# Altium PCB PCB2.PcbDoc
Units mm, origin at the board's own origin, x right, y up, seen from the top; angles counter-clockwise.
Board outline 100 x 100 mm, 2 copper layers (Top Layer, Bottom Layer); 17 components, 59 nets, 177 pads, 15 vias.
Unrouted connection lines stored in the file: 5.
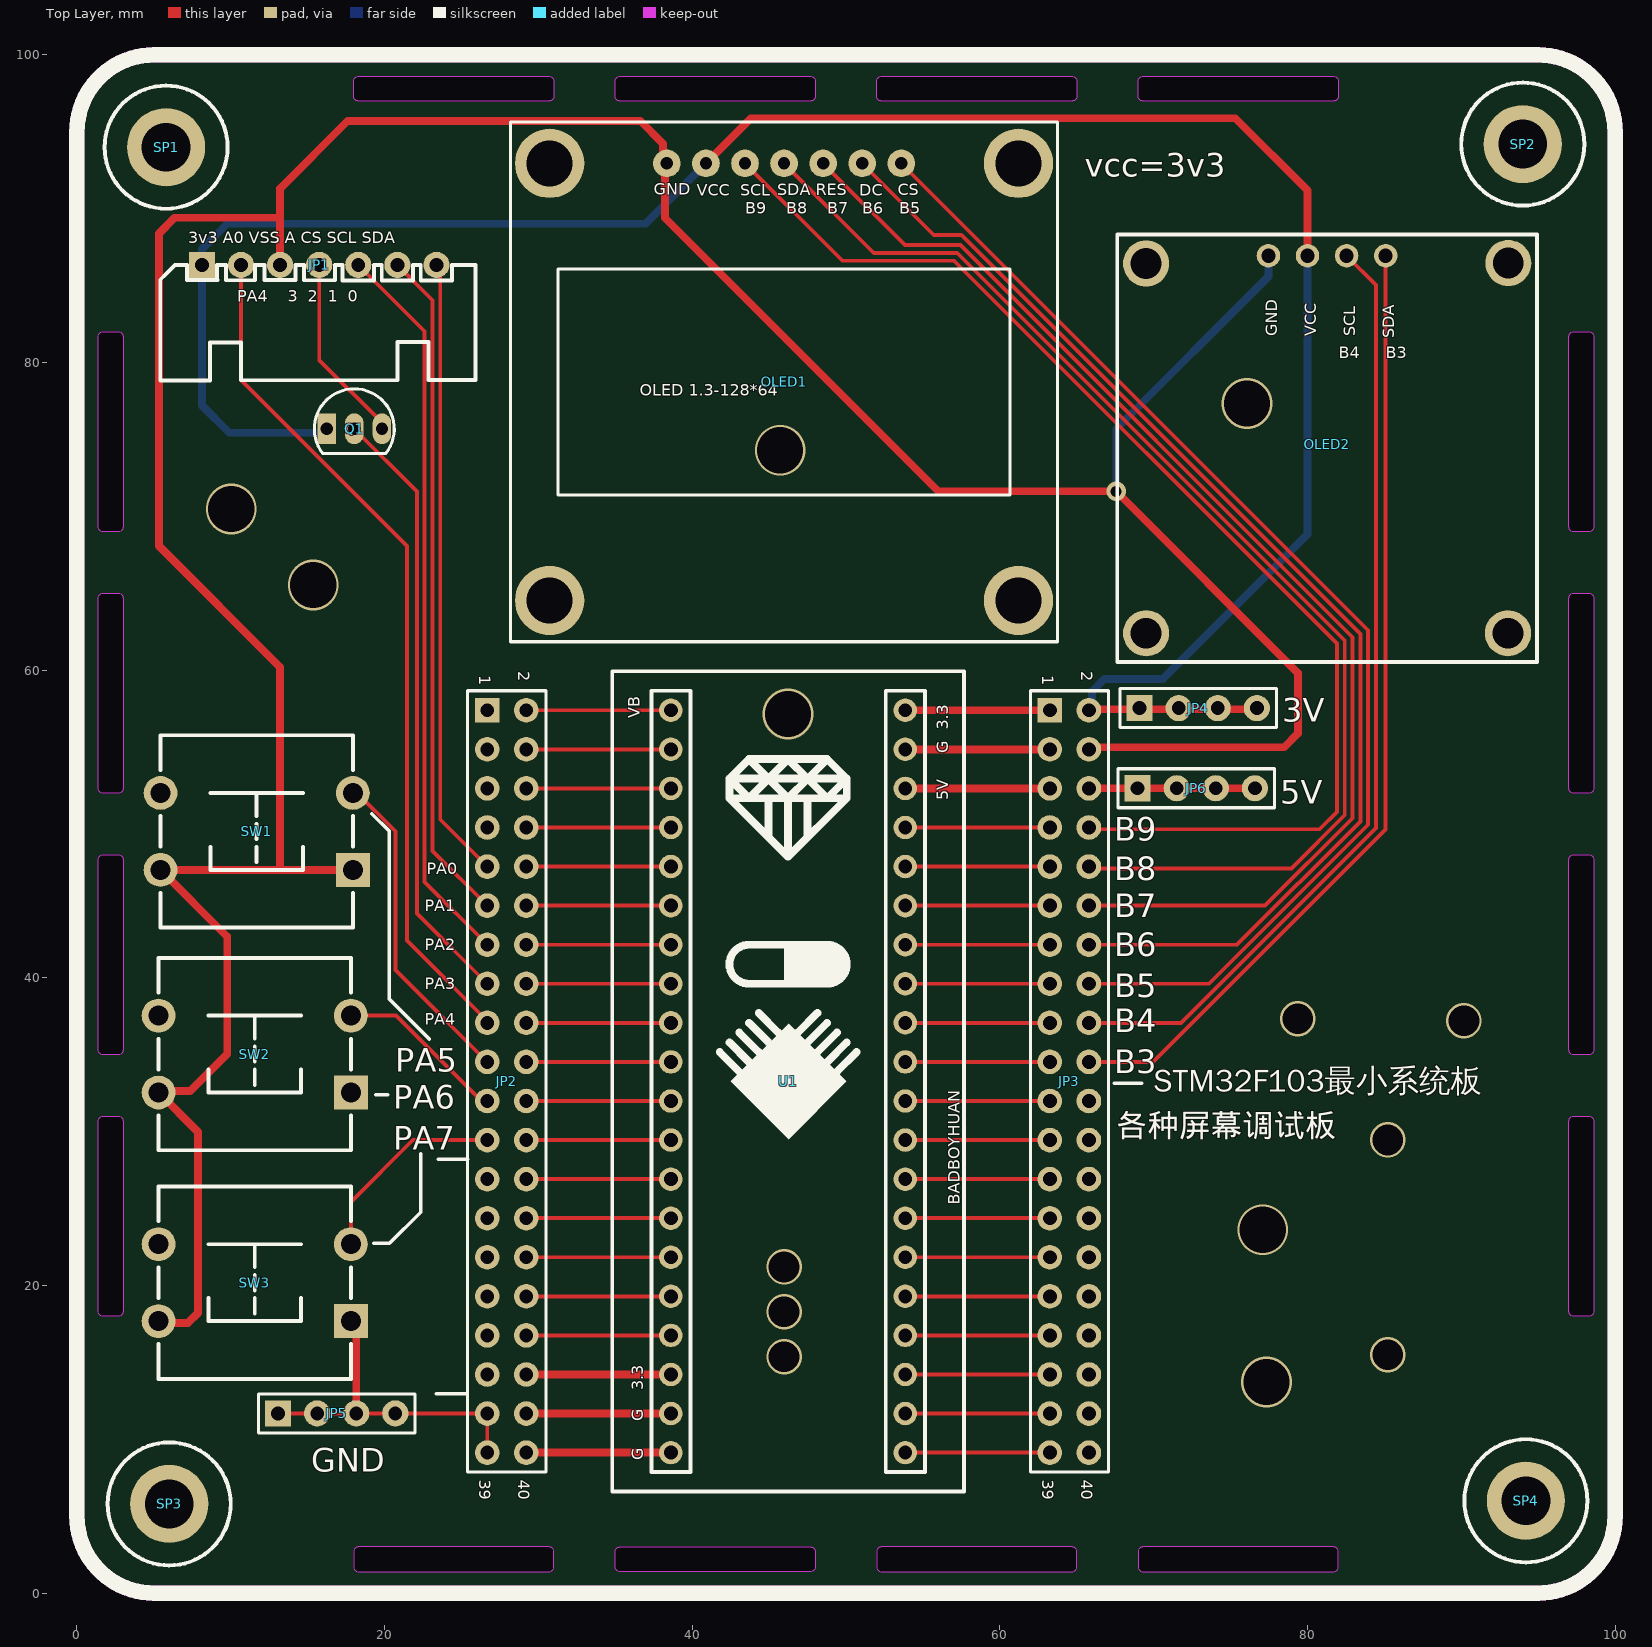
[diagram p0: Top Layer view]
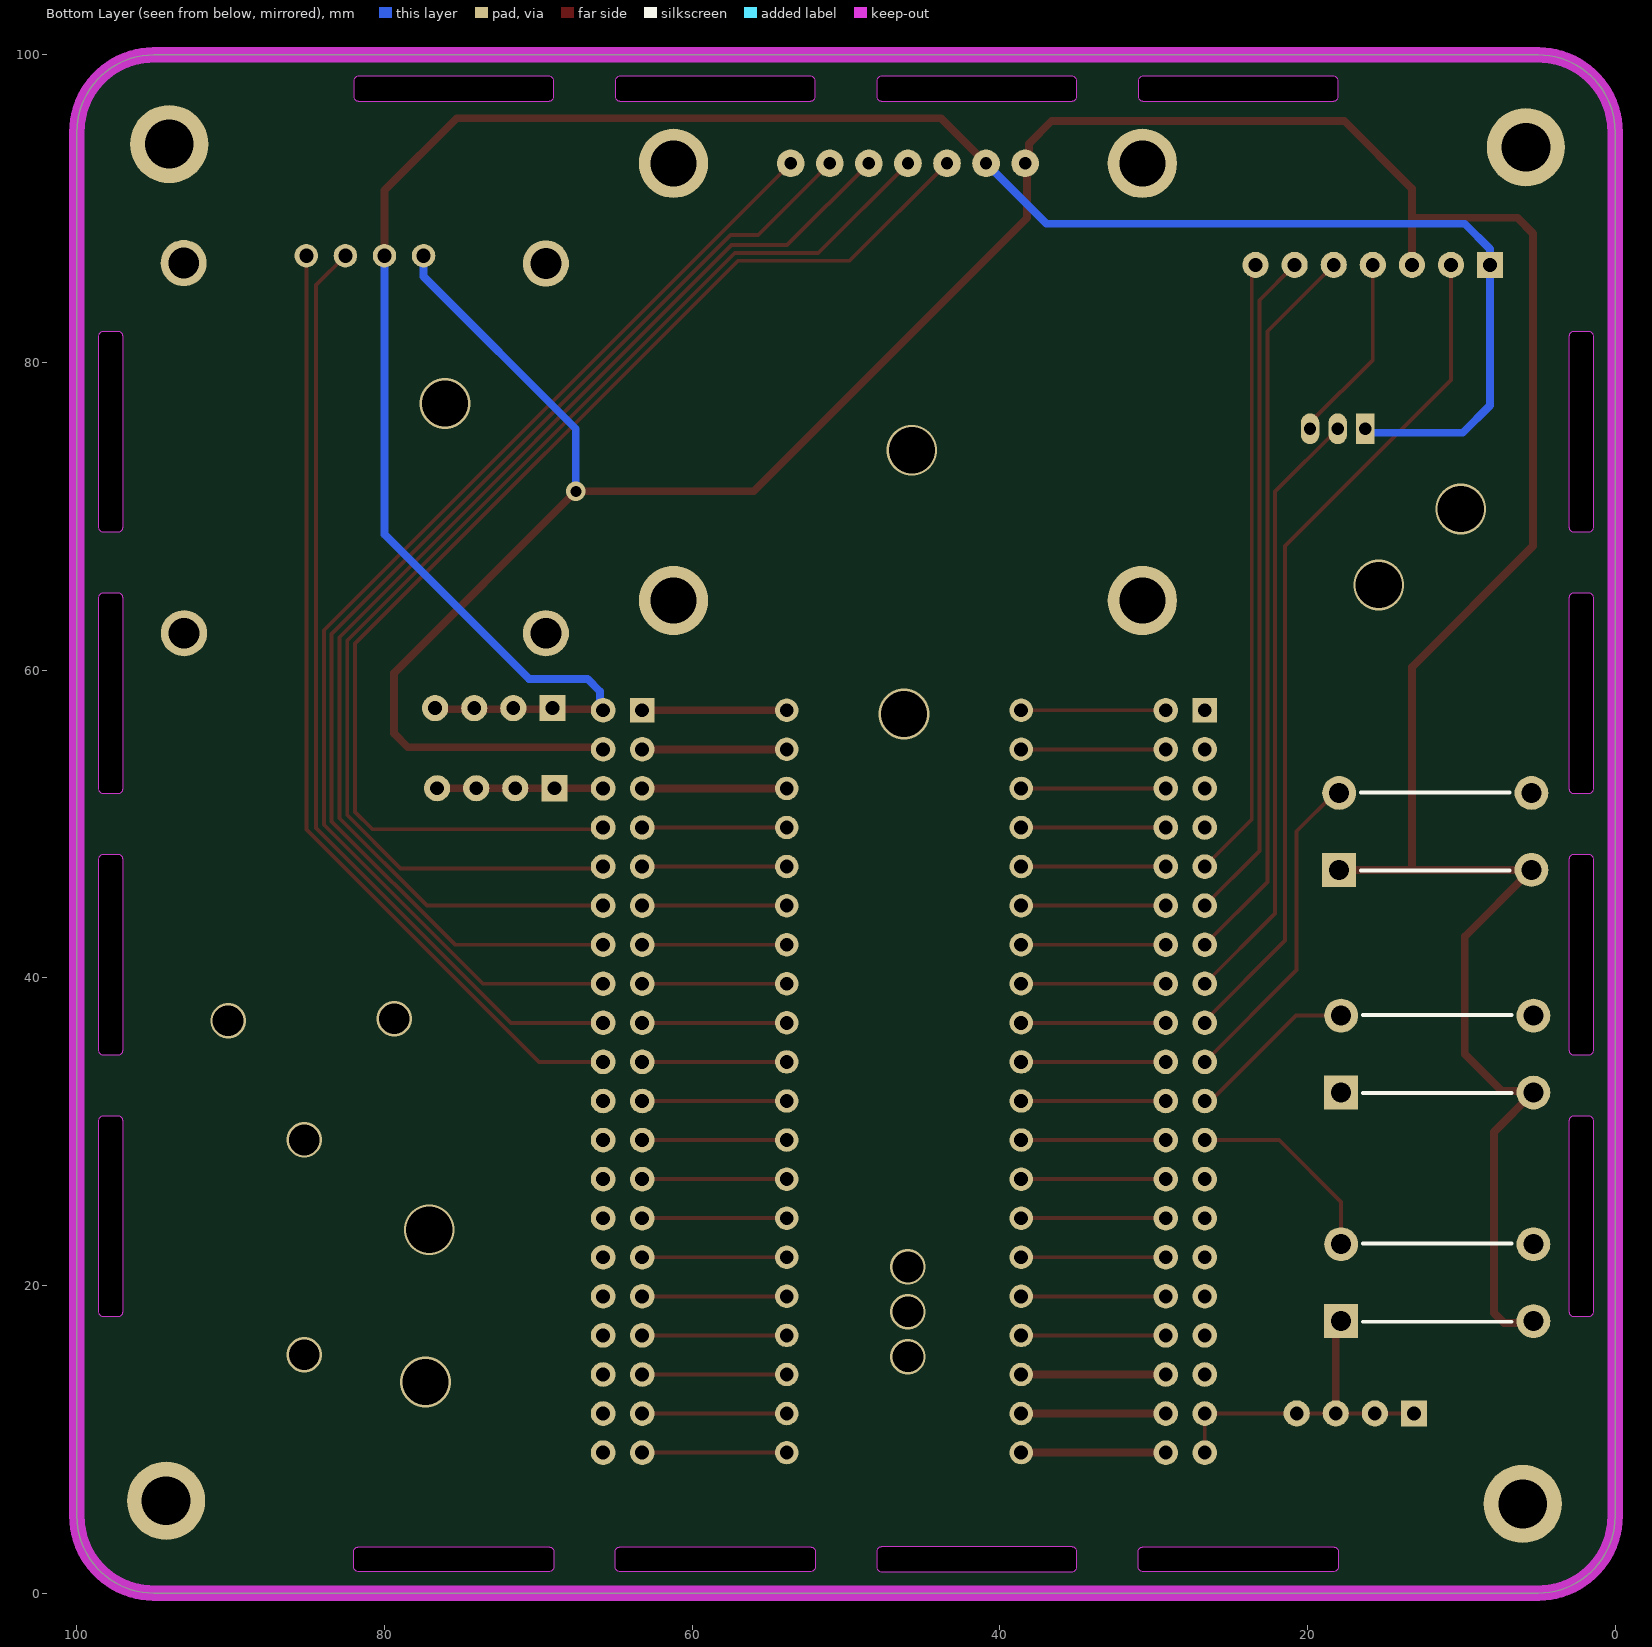
[diagram p1: Bottom Layer view, seen from below]

## Layer stack, top to bottom
Top Solder: solder mask 0.0102, Solder Resist, Dk 3.5
Top Layer: signal copper 0.0356
Dielectric 1: dielectric 0.32, FR-4, Dk 4.8
Bottom Layer: signal copper 0.0356
Bottom Solder: solder mask 0.0102, Solder Resist, Dk 3.5

## Board outline
0,5 0,95 cw(c5,95) 5,100 95,100 cw(c95,95) 100,95 100,5 cw(c95,5) 95,0 5,0 cw(c5,5)
cut-out: 2.7,69 1.7,69 cw(c1.7,69.3) 1.4,69.3 1.4,81.7 cw(c1.7,81.7) 1.7,82 2.7,82 cw(c2.7,81.7) 3,81.7 3,69.3 cw(c2.7,69.3)
cut-out: 2.7,52 1.7,52 cw(c1.7,52.3) 1.4,52.3 1.4,64.7 cw(c1.7,64.7) 1.7,65 2.7,65 cw(c2.7,64.7) 3,64.7 3,52.3 cw(c2.7,52.3)
cut-out: 2.7,35 1.7,35 cw(c1.7,35.3) 1.4,35.3 1.4,47.7 cw(c1.7,47.7) 1.7,48 2.7,48 cw(c2.7,47.7) 3,47.7 3,35.3 cw(c2.7,35.3)
cut-out: 2.7,18 1.7,18 cw(c1.7,18.3) 1.4,18.3 1.4,30.7 cw(c1.7,30.7) 1.7,31 2.7,31 cw(c2.7,30.7) 3,30.7 3,18.3 cw(c2.7,18.3)
cut-out: 69,97.3 69,98.3 cw(c69.3,98.3) 69.3,98.6 81.7,98.6 cw(c81.7,98.3) 82,98.3 82,97.3 cw(c81.7,97.3) 81.7,97 69.3,97 cw(c69.3,97.3)
cut-out: 52,97.3 52,98.3 cw(c52.3,98.3) 52.3,98.6 64.7,98.6 cw(c64.7,98.3) 65,98.3 65,97.3 cw(c64.7,97.3) 64.7,97 52.3,97 cw(c52.3,97.3)
cut-out: 35,97.3 35,98.3 cw(c35.3,98.3) 35.3,98.6 47.7,98.6 cw(c47.7,98.3) 48,98.3 48,97.3 cw(c47.7,97.3) 47.7,97 35.3,97 cw(c35.3,97.3)
cut-out: 18,97.3 18,98.3 cw(c18.3,98.3) 18.3,98.6 30.7,98.6 cw(c30.7,98.3) 31,98.3 31,97.3 cw(c30.7,97.3) 30.7,97 18.3,97 cw(c18.3,97.3)
cut-out: 97.3,31 98.3,31 cw(c98.3,30.7) 98.6,30.7 98.6,18.3 cw(c98.3,18.3) 98.3,18 97.3,18 cw(c97.3,18.3) 97,18.3 97,30.7 cw(c97.3,30.7)
cut-out: 97.3,48 98.3,48 cw(c98.3,47.7) 98.6,47.7 98.6,35.3 cw(c98.3,35.3) 98.3,35 97.3,35 cw(c97.3,35.3) 97,35.3 97,47.7 cw(c97.3,47.7)
cut-out: 97.3,65 98.3,65 cw(c98.3,64.7) 98.6,64.7 98.6,52.3 cw(c98.3,52.3) 98.3,52 97.3,52 cw(c97.3,52.3) 97,52.3 97,64.7 cw(c97.3,64.7)
cut-out: 97.3,82 98.3,82 cw(c98.3,81.7) 98.6,81.7 98.6,69.3 cw(c98.3,69.3) 98.3,69 97.3,69 cw(c97.3,69.3) 97,69.3 97,81.7 cw(c97.3,81.7)
cut-out: 18,1.7 ccw(c18.3,1.7) 18.3,1.4 30.7,1.4 ccw(c30.7,1.7) 31,1.7 31,2.7 ccw(c30.7,2.7) 30.7,3 18.3,3 ccw(c18.3,2.7) 18,2.7
cut-out: 35,1.7 35,2.7 cw(c35.3,2.7) 35.3,3 47.7,3 cw(c47.7,2.7) 48,2.7 48,1.7 cw(c47.7,1.7) 47.7,1.4 35.3,1.4 cw(c35.3,1.7)
cut-out: 52,1.7 ccw(c52.3,1.7) 52.3,1.4 64.7,1.4 ccw(c64.7,1.7) 65,1.7 65,2.7 ccw(c64.7,2.7) 64.7,3 52.3,3 ccw(c52.3,2.7) 52,2.7
cut-out: 69,1.7 ccw(c69.3,1.7) 69.3,1.4 81.7,1.4 ccw(c81.7,1.7) 82,1.7 82,2.7 ccw(c81.7,2.7) 81.7,3 69.3,3 ccw(c69.3,2.7) 69,2.7

## Design rules (kind name [scope] priority, off if disabled: settings)
Clearance [All] p1: gap=0.254 ignorepadtopadclearanceinfootprint=FALSE except(0: Arc-Hole Track-Hole SMDPad-Hole THPad-Hole Via-Hole Fill-Hole Poly-Hole Region-Hole Text-Hole)
PolygonConnect [All] p1: connectstyle=Relief reliefconductorwidth=0.254 reliefentries=4 polygonreliefangle="90 Angle" airgapwidth=0.254
RoutingVias [All] p1: holewidth=0.711 width=1.27 viastyle="Through Hole" minholewidth=0.711 minwidth=1.27 maxholewidth=0.711 maxwidth=1.27
SolderMaskExpansion [All] p1: expansion=0.102 istentingtop=FALSE
Width [All] p1: maxlimit=1.016 minlimit=0.254 preferedwidth=0.254 minimp=50.000000 maximp=50.000000 favimp=50.000000
30 further rules are at their usual default settings.

## Components (designator, comment, footprint, x,y, rotation, side; value= is the part's Value field where it differs from the comment)
JP1 "HDR-1X7" XH2.54-WI-7P 15.753,86.349 r0 top
JP2 "Header 2X11" HDR2.54-LI-2x20P 27.945,33.263 r270 top
JP3 "Header 2X11" HDR2.54-LI-2x20P 64.521,33.263 r270 top
JP4 "HDR-1X4" HDR2.54-M-LI-4P 72.898,57.531 r0 top
JP5 "HDR-1X4" HDR2.54-LI-4P 16.891,11.684 r0 top
JP6 "HDR-1X4" HDR2.54-LI-4P 72.771,52.324 r0 top
OLED1 "OLED 1.3-12864_7pin" 1.3-SPI-OLED 45.974,78.74 r0 top
OLED2 "OLED-IIC" 0.96-IIC-OLED 81.28,74.422 r0 top
Q1 "S9012" TO92A 18.034,75.692 r270 top
SP1 "M3铜柱" M3x4_L 5.8,94 r90 top
SP2 "M3铜柱" M3x4_L 94,94.2 r0 top
SP3 "M3铜柱" M3x4_L 6,5.8 r180 top
SP4 "M3铜柱" M3x4_L 94.2,6 r270 top
SW1 "12x12x5" "TSW DIP-12*12*4.3" 11.689,49.519 r180 top
SW2 "12x12x5" "TSW DIP-12*12*4.3" 11.562,35.041 r180 top
SW3 "12x12x5" "TSW DIP-12*12*4.3" 11.562,20.182 r180 top
U1 "STM32C8T6最小系统板" STM32C8T6 53.853,57.393 r0 top

## Footprints (in the part's own frame and the unit in brackets; to place one, negate y for a bottom-side part, rotate by r counter-clockwise, add the part's x,y. Pads: shape width x height; smd on the part's side, far side on the other; paste and mask are expansions set on the pad)
0.96-IIC-OLED [mm]
  round 1.524 hole 0.914: 1(-3.816,12.521) 2(-1.276,12.521) 3(1.264,12.521) 4(3.804,12.521)
  round 3 hole 2: 5(-11.769,12.015) 6(11.779,12.043) 7(-11.769,-12.021) 8(11.754,-12.018)
  silkscreen extent -13.65,-13.89 13.65,13.89, body extent -13.35,-12.87 13.35,14.99, height 4.01
1.3-SPI-OLED [mm] "长：35.4mm，宽：33.5mm，"
  round 4.5 hole 3: 0(-15.24,-14.21) 0(-15.24,14.21) 0(15.24,-14.21) 0(15.24,14.21)
  round 1.8 hole 0.8: 1(-7.62,14.21) 2(-5.08,14.21) 3(-2.54,14.21) 4(0,14.21) 5(2.54,14.21) 6(5.08,14.21) 7(7.62,14.21)
  silkscreen extent -17.78,-16.89 17.78,16.89, body extent -17.7,-16.75 17.7,16.75, height 5.5
HDR2.54-LI-2x20P [mm] "双排排针，20x2脚"
  rect 1.6x1.6 hole 0.9: 1(-24.13,-1.27)
  round 1.6 hole 0.9: 2(-24.13,1.27) 3(-21.59,-1.27) 4(-21.59,1.27) 5(-19.05,-1.27) 6(-19.05,1.27) 7(-16.51,-1.27) 8(-16.51,1.27) 9(-13.97,-1.27) 10(-13.97,1.27) 11(-11.43,-1.27) 12(-11.43,1.27) 13(-8.89,-1.27) 14(-8.89,1.27) 15(-6.35,-1.27) 16(-6.35,1.27) 17(-3.81,-1.27) 18(-3.81,1.27) 19(-1.27,-1.27) 20(-1.27,1.27) 21(1.27,-1.27) 22(1.27,1.27) 23(3.81,-1.27) 24(3.81,1.27) 25(6.35,-1.27) 26(6.35,1.27) 27(8.89,-1.27) 28(8.89,1.27) 29(11.43,-1.27) 30(11.43,1.27) 31(13.97,-1.27) 32(13.97,1.27) 33(16.51,-1.27) 34(16.51,1.27) 35(19.05,-1.27) 36(19.05,1.27) 37(21.59,-1.27) 38(21.59,1.27) 39(24.13,-1.27) 40(24.13,1.27)
  silkscreen extent -25.4,-2.54 25.4,2.54, body extent -25.4,-2.54 25.4,2.54, height 8.5
HDR2.54-LI-4P [mm] "排针，4脚"
  rect 1.7x1.7 hole 0.9: 1(-3.81,0)
  round 1.7 hole 0.9: 2(-1.27,0) 3(1.27,0) 4(3.81,0)
  silkscreen extent -5.08,-1.27 5.08,1.27, body extent -5.08,-1.27 5.08,1.27, height 8.5
HDR2.54-M-LI-4P [mm] "排母，4脚"
  rect 1.7x1.7 hole 0.9: 1(-3.81,0)
  round 1.7 hole 0.9: 2(-1.27,0) 3(1.27,0) 4(3.81,0)
  silkscreen extent -5.08,-1.27 5.08,1.27, body extent -5.08,-1.27 5.08,1.27, height 8.5
M3x4_L [mm] "M3铜柱，长：4mm"
  round 5.08 hole 3.175: 1(0,0)
  silkscreen extent -4,-4 4,4, body extent -2.7,-2.35 2.7,2.35, height 4.05
STM32C8T6 [mil]
  round 60 hole 35.43: 0(0,0) 1(0,-100) 2(0,-200) 3(0,-300) 4(0,-400) 5(0,-500) 6(0,-600) 7(0,-700) 8(0,-800) 9(0,-900) 10(0,-1000) 11(0,-1100) 12(0,-1200) 13(0,-1300) 14(0,-1400) 15(0,-1500) 16(0,-1600) 17(0,-1700) 18(0,-1800) 19(0,-1900) 20(-600,0) 21(-600,-100) 22(-600,-200) 23(-600,-300) 24(-600,-400) 25(-600,-500) 26(-600,-600) 27(-600,-700) 28(-600,-800) 29(-600,-900) 30(-600,-1000) 31(-600,-1100) 32(-600,-1200) 33(-600,-1300) 34(-600,-1400) 35(-600,-1500) 36(-600,-1600) 37(-600,-1700) 38(-600,-1800) 39(-600,-1900)
  silkscreen extent -750,-2000 150,100
TO92A [mm] "92晶体管"
  rect 2x1.2 hole 0.8: 1(0,-1.8)
  oval 2x1.2 hole 0.8: 2(0,0) 3(0,1.8)
  silkscreen extent -2.6,-2.6 1.6,2.6, body extent -2.3,-2.3 1.3,2.3, height 7.6
"TSW DIP-12*12*4.3" [mm] "12*12*4.3mm"
  rect 2.2x2.2 hole 1.3: 1(-6.25,2.5)
  round 2.2 hole 1.3: 2(-6.25,-2.5) 3(6.25,-2.5) 4(6.25,2.5)
  silkscreen extent -6.25,-6.25 6.25,6.25, body extent -6.9,-6 6.9,6, height 4.45
XH2.54-WI-7P [mm] "接插件，7P"
  rect 1.7x1.7 hole 0.9: 1(-7.62,0)
  round 1.7 hole 0.9: 2(-5.08,0) 3(-2.54,0) 4(0,0) 5(2.54,0) 6(5.08,0) 7(7.62,0)
  silkscreen extent -10.34,-7.53 10.16,0, body extent -10.12,-7.35 10.12,0.35, height 5.75

## Part data
JP1: library part "Header 7  2.54", "7P接插件  2.54", BOM名称=7P接插件, 学习资源=www.ooocke.com, 版权归属=源创客
JP2 JP3: library part "Header 20X2  2.54", "20*2P接插件  2.54", BOM名称=20*2P接插件, 学习资源=www.ooocke.com, 版权归属=源创客
JP4 JP5 JP6: library part "Header 4  2.54", "4P接插件  2.54", BOM名称=4P接插件, 学习资源=www.ooocke.com, 版权归属=源创客
OLED1: library part OLED-SPI, "12864 点阵屏", BOM名称="12864 点阵屏", 学习资源=www.ooocke.com, 版权归属=源创客
OLED2: "OLED 0.96寸 1.3寸 IIC显示屏"
Q1: library part 9012-DIP, "低频放大-PNP型", BOM名称=低频放大-PNP型, 学习资源=www.ooocke.com, 属性="50V 0.5A 0.625W", 版权归属=源创客
SP1 SP2 SP3 SP4: library part 铜柱小焊盘, "铜柱", BOM名称=铜柱, 学习资源=www.ooocke.com, 版权归属=源创客
SW1 SW2 SW3: library part "TSW DIP-12x12", "直插12x12轻触开关", BOM名称=直插12x12轻触开关, 学习资源=www.ooocke.com, 版权归属=源创客

## Via types
v1: diameter 3.3, hole 3, Top Layer to Bottom Layer, tented both sides, 7 vias
v2: diameter 2.3, hole 2, Top Layer to Bottom Layer, tented both sides, 7 vias
v3: diameter 1.27, hole 0.711, Top Layer to Bottom Layer, 1 vias

## Nets (pads, with @x,y where several pads share a name; then routed paths per layer and width w, separated by ;. In a path a pad name is that pad's centre, name@x,y a point inside that pad or via, vN(x,y) a via of type N, cw(c..) or ccw(c..) an arc to the next point about the centre after c; other vN are vias at no path point)
3V3: JP1.1 JP3.2 JP4.1 JP4.2 JP4.3 JP4.4 OLED1.2 OLED2.2 Q1.1 | length 149.3
  Top Layer w0.508: OLED1.2 43.829,95.885 75.311,95.885 80.01,91.186 80.01,86.949 OLED2.2 ; JP3.2 65.86,57.462 76.639,57.462 JP4.4
  Bottom Layer w0.508: Q1.1 15.98,75.438 9.906,75.438 8.133,77.211 8.133,87.381 9.779,89.027 36.971,89.027 OLED1.2 ; JP3.2 66,57.602 66,58.634 66.802,59.436 70.612,59.436 80.004,68.828 OLED2.2
5V: JP3.6 JP6.1 JP6.2 JP6.3 JP6.4 | length 10.8
  Top Layer w0.508: JP3.6 65.797,52.318 76.575,52.318 JP6.4
A: JP1.4 Q1.3 | length 12.3
  Top Layer w0.254: JP1.4 15.753,80.173 19.834,76.092 Q1.3
A0: JP1.2 JP2.17 | length 55.9
  Top Layer w0.254: JP1.2 10.673,78.862 21.463,68.072 21.463,42.418 26.675,37.206 JP2.17
CS: JP1.5 JP2.13 | length 47.7
  Top Layer w0.254: JP1.5 22.606,82.036 22.606,46.222 JP2.13
NetJP2_2: JP2.2 U1.20 | length 9.4
  Top Layer w0.254: JP2.2 U1.20
NetJP2_4: JP2.4 U1.21 | length 9.4
  Top Layer w0.254: JP2.4 U1.21
NetJP2_6: JP2.6 U1.22 | length 9.4
  Top Layer w0.254: JP2.6 U1.22
NetJP2_8: JP2.8 U1.23 | length 9.4
  Top Layer w0.254: JP2.8 U1.23
NetJP2_10: JP2.10 U1.24 | length 9.4
  Top Layer w0.254: JP2.10 U1.24
NetJP2_12: JP2.12 U1.25 | length 9.4
  Top Layer w0.254: JP2.12 U1.25
NetJP2_14: JP2.14 U1.26 | length 9.4
  Top Layer w0.254: JP2.14 U1.26
NetJP2_15: JP2.15 Q1.2 | length 39.7
  Top Layer w0.254: Q1.2 22.098,71.628 22.098,44.19 JP2.15
NetJP2_16: JP2.16 U1.27 | length 9.4
  Top Layer w0.254: JP2.16 U1.27
NetJP2_18: JP2.18 U1.28 | length 9.4
  Top Layer w0.254: JP2.18 U1.28
NetJP2_20: JP2.20 U1.29 | length 9.4
  Top Layer w0.254: JP2.20 U1.29
NetJP2_22: JP2.22 U1.30 | length 9.4
  Top Layer w0.254: JP2.22 U1.30
NetJP2_24: JP2.24 U1.31 | length 9.4
  Top Layer w0.254: JP2.24 U1.31
NetJP2_26: JP2.26 U1.32 | length 9.4
  Top Layer w0.254: JP2.26 U1.32
NetJP2_28: JP2.28 U1.33 | length 9.4
  Top Layer w0.254: JP2.28 U1.33
NetJP2_30: JP2.30 U1.34 | length 9.4
  Top Layer w0.254: JP2.30 U1.34
NetJP2_32: JP2.32 U1.35 | length 9.4
  Top Layer w0.254: JP2.32 U1.35
NetJP2_34: JP2.34 U1.36 | length 9.4
  Top Layer w0.254: JP2.34 U1.36
NetJP2_36: JP2.36 U1.37 | length 18.8
  Top Layer w0.254: JP2.36 U1.37
  Top Layer w0.508: JP2.36 U1.37
NetJP2_38: JP2.38 U1.38 | length 18.8
  Top Layer w0.254: JP2.38 U1.38
  Top Layer w0.508: JP2.38 U1.38
NetJP2_40: JP2.40 U1.39 | length 18.8
  Top Layer w0.254: JP2.40 U1.39
  Top Layer w0.508: JP2.40 U1.39
NetJP3_1: JP3.1 U1.0 | length 9.4
  Top Layer w0.508: U1.0 JP3.1
NetJP3_3: JP3.3 U1.1 | length 18.8
  Top Layer w0.254: U1.1 JP3.3
  Top Layer w0.508: U1.1 JP3.3
NetJP3_5: JP3.5 U1.2 | length 9.4
  Top Layer w0.508: U1.2 JP3.5
NetJP3_7: JP3.7 U1.3 | length 9.4
  Top Layer w0.254: U1.3 JP3.7
NetJP3_8: JP3.8 OLED1.3 | length 79
  Top Layer w0.254: OLED1.3 49.77,86.614 57.023,86.614 81.915,61.722 81.915,50.793 80.779,49.657 65.907,49.657 JP3.8
NetJP3_9: JP3.9 U1.4 | length 9.4
  Top Layer w0.254: U1.4 JP3.9
NetJP3_10: JP3.10 OLED1.4 | length 78.8
  Top Layer w0.254: OLED1.4 51.802,87.122 57.233,87.122 82.423,61.932 82.423,50.582 78.958,47.117 65.907,47.117 JP3.10
NetJP3_11: JP3.11 U1.5 | length 9.4
  Top Layer w0.254: U1.5 JP3.11
NetJP3_12: JP3.12 OLED1.5 | length 78.4
  Top Layer w0.254: OLED1.5 53.834,87.63 57.444,87.63 82.931,62.143 82.931,50.372 77.252,44.693 JP3.12
NetJP3_13: JP3.13 U1.6 | length 9.4
  Top Layer w0.254: U1.6 JP3.13
NetJP3_14: JP3.14 OLED1.6 | length 78.2
  Top Layer w0.254: OLED1.6 55.703,88.301 57.495,88.301 83.439,62.357 83.439,50.161 75.431,42.153 JP3.14
NetJP3_15: JP3.15 U1.7 | length 9.4
  Top Layer w0.254: U1.7 JP3.15
NetJP3_16: JP3.16 OLED1.7 | length 78
  Top Layer w0.254: OLED1.7 83.947,62.597 83.947,49.951 73.609,39.613 JP3.16
NetJP3_17: JP3.17 U1.8 | length 9.4
  Top Layer w0.254: U1.8 JP3.17
NetJP3_18: JP3.18 OLED2.3 | length 61.9
  Top Layer w0.254: JP3.18 71.788,37.073 84.455,49.74 84.455,85.032 OLED2.3
NetJP3_19: JP3.19 U1.9 | length 9.4
  Top Layer w0.254: U1.9 JP3.19
NetJP3_20: JP3.20 OLED2.4 | length 62.8
  Top Layer w0.254: JP3.20 69.966,34.533 85.084,49.651 OLED2.4
NetJP3_21: JP3.21 U1.10 | length 9.4
  Top Layer w0.254: U1.10 JP3.21
NetJP3_23: JP3.23 U1.11 | length 9.4
  Top Layer w0.254: U1.11 JP3.23
NetJP3_25: JP3.25 U1.12 | length 9.4
  Top Layer w0.254: U1.12 JP3.25
NetJP3_27: JP3.27 U1.13 | length 9.4
  Top Layer w0.254: U1.13 JP3.27
NetJP3_29: JP3.29 U1.14 | length 9.4
  Top Layer w0.254: U1.14 JP3.29
NetJP3_31: JP3.31 U1.15 | length 9.4
  Top Layer w0.254: U1.15 JP3.31
NetJP3_33: JP3.33 U1.16 | length 9.4
  Top Layer w0.254: U1.16 JP3.33
NetJP3_35: JP3.35 U1.17 | length 9.4
  Top Layer w0.254: U1.17 JP3.35
NetJP3_37: JP3.37 U1.18 | length 9.4
  Top Layer w0.254: U1.18 JP3.37
NetJP3_39: JP3.39 U1.19 | length 9.4
  Top Layer w0.254: U1.19 JP3.39
PA5: JP2.19 SW1.2 SW1.3 | length 21.3
  Top Layer w0.254: SW1.2 18.212,52.019 20.701,49.53 20.701,40.507 JP2.19
PA6: JP2.21 SW2.2 SW2.3 | length 11.2
  Top Layer w0.254: SW2.2 20.752,37.541 25.906,32.387 25.917,32.387 26.311,31.993 JP2.21
PA7: JP2.23 SW3.2 SW3.3 | length 13.3
  Top Layer w0.254: SW3.2 17.812,25.432 21.833,29.453 JP2.23
SCL: JP1.6 JP2.11 | length 44.1
  Top Layer w0.254: JP1.6 20.833,86.333 23.114,84.052 23.114,48.254 JP2.11
SDA: JP1.7 JP2.9 | length 40.5
  Top Layer w0.254: JP1.7 23.622,86.1 23.622,50.286 JP2.9
VSS: JP1.3 JP2.37 JP2.39 JP3.4 JP5.1 JP5.2 JP5.3 JP5.4 OLED1.1 OLED2.1 SW1.1 SW1.4 SW2.1 SW2.4 SW3.1 SW3.4 | length 253.3
  Top Layer w0.254: JP5.1 13.092,11.673 JP2.37 JP2.39
  Top Layer w0.508: SW3.4 5.439,17.555 7.214,17.555 7.874,18.215 7.874,29.979 SW2.4 5.41,32.639 7.366,32.639 9.779,35.052 9.779,42.679 SW1.4 13.208,47.019 ; JP1.3 13.213,89.408 ; SW3.1 18.161,17.333 JP5.3 ; SW1.1 13.208,47.019 ; JP3.4 65.929,54.991 78.486,54.991 79.375,55.88 79.375,59.817 v3(67.564,71.628) 56.007,71.628 38.227,89.408 38.227,92.823 OLED1.1 38.107,93.197 38.107,94.227 36.626,95.708 17.603,95.708 13.213,91.318 13.213,89.408 ; 13.208,47.019 13.208,60.198 5.334,68.072 5.334,88.392 6.35,89.408 13.213,89.408
  Bottom Layer w0.508: v3(67.564,71.628) 67.564,75.692 77.47,85.598 77.47,86.937 OLED2.1
pads on no net: JP2.1 JP2.3 JP2.5 JP2.7 JP2.25 JP2.27 JP2.29 JP2.31 JP2.33 JP2.35 JP3.22 JP3.24 JP3.26 JP3.28 JP3.30 JP3.32 JP3.34 JP3.36 JP3.38 JP3.40 OLED1.0 OLED2.5 OLED2.6 OLED2.7 OLED2.8 SP1.1 SP2.1 SP3.1 SP4.1
copper on no net:
  other v1: 77.343,13.716 77.089,23.622 46.228,57.15 15.367,65.532 10.033,70.485 45.72,74.295 76.073,77.343
  other v2: 45.974,15.367 85.217,15.494 45.974,18.288 45.974,21.209 85.217,29.464 90.17,37.211 79.375,37.338

## Keep-outs
Keep-Out Layer:
  the board outline again, w1

## Silkscreen, mask and mechanical layers (free items; w line width, h text height)
Top Overlay:
  lines w0.229: 19.177,50.673 20.32,49.53 20.32,38.602 22.921,36.002 ; 19.304,22.733 20.32,22.733 22.352,24.765 22.352,28.575 ; 19.431,32.385 20.193,32.385 ; 23.368,12.954 25.273,12.954 ; 23.495,28.194 25.4,28.194 ; 67.437,33.147 69.215,33.147
  lines w1: 95,0 ccw(c95,5) 100,5 100,95 ccw(c95,95) 95,100 5,100 ccw(c5,95) 0,95 0,5 ccw(c5,5) 5,0 95,0 ; 95,0 95,0
  text "vcc=3v3" at 65.532,92.075 h1.52
  text "B9" at 43.434,89.662 h0.76
  text "B8" at 46.101,89.662 h0.76
  text "B7" at 48.768,89.662 h0.76
  text "B6" at 51.054,89.662 h0.76
  text "B5" at 53.467,89.662 h0.76
  text "3v3 A0 VSS A CS SCL SDA" at 7.239,87.757 h0.76
  text "PA4    3  2  1  0" at 10.414,83.947 h0.76
  text "B4" at 82.042,80.264 h0.76
  text "B3" at 85.09,80.264 h0.76
  text "3V" at 78.359,56.642 h1.52
  text "5V" at 78.232,51.308 h1.52
  text "B9" at 67.437,48.895 h1.52
  text "PA0" at 22.733,46.736 h0.76
  text "B8" at 67.437,46.355 h1.52
  text "PA1" at 22.606,44.323 h0.76
  text "B7" at 67.437,43.942 h1.52
  text "PA2" at 22.606,41.783 h0.76
  text "B6" at 67.437,41.402 h1.52
  text "PA3" at 22.606,39.243 h0.76
  text "B5" at 67.437,38.735 h1.52
  text "PA4" at 22.606,36.957 h0.76
  text "B4" at 67.437,36.449 h1.52
  text "PA5" at 20.701,33.909 h1.52
  text "B3" at 67.437,33.782 h1.52
  text "STM32F103最小系统板" at 69.977,32.112 h2.54
  text "PA6" at 20.574,31.496 h1.52
  text "各种屏幕调试板" at 67.564,29.191 h2.54
  text "PA7" at 20.574,28.829 h1.52
  text "GND" at 15.24,7.874 h1.52
Mechanical 13:
  lines w0.1: 1.4,18.3 ccw(c1.7,18.3) 1.7,18 2.7,18 ccw(c2.7,18.3) 3,18.3 3,30.7 ccw(c2.7,30.7) 2.7,31 1.7,31 ccw(c1.7,30.7) 1.4,30.7 1.4,18.3 ; 1.4,35.3 ccw(c1.7,35.3) 1.7,35 2.7,35 ccw(c2.7,35.3) 3,35.3 3,47.7 ccw(c2.7,47.7) 2.7,48 1.7,48 ccw(c1.7,47.7) 1.4,47.7 1.4,35.3 ; 1.4,52.3 ccw(c1.7,52.3) 1.7,52 2.7,52 ccw(c2.7,52.3) 3,52.3 3,64.7 ccw(c2.7,64.7) 2.7,65 1.7,65 ccw(c1.7,64.7) 1.4,64.7 1.4,52.3 ; 1.4,69.3 ccw(c1.7,69.3) 1.7,69 2.7,69 ccw(c2.7,69.3) 3,69.3 3,81.7 ccw(c2.7,81.7) 2.7,82 1.7,82 ccw(c1.7,81.7) 1.4,81.7 1.4,69.3 ; 18,1.7 ccw(c18.3,1.7) 18.3,1.4 30.7,1.4 ccw(c30.7,1.7) 31,1.7 31,2.7 ccw(c30.7,2.7) 30.7,3 18.3,3 ccw(c18.3,2.7) 18,2.7 18,1.7 ; 18,97.3 ccw(c18.3,97.3) 18.3,97 30.7,97 ccw(c30.7,97.3) 31,97.3 31,98.3 ccw(c30.7,98.3) 30.7,98.6 18.3,98.6 ccw(c18.3,98.3) 18,98.3 18,97.3 ; 35,1.7 ccw(c35.3,1.7) 35.3,1.4 47.7,1.4 ccw(c47.7,1.7) 48,1.7 48,2.7 ccw(c47.7,2.7) 47.7,3 35.3,3 ccw(c35.3,2.7) 35,2.7 35,1.7 ; 35,97.3 ccw(c35.3,97.3) 35.3,97 47.7,97 ccw(c47.7,97.3) 48,97.3 48,98.3 ccw(c47.7,98.3) 47.7,98.6 35.3,98.6 ccw(c35.3,98.3) 35,98.3 35,97.3 ; 52,1.7 ccw(c52.3,1.7) 52.3,1.4 64.7,1.4 ccw(c64.7,1.7) 65,1.7 65,2.7 ccw(c64.7,2.7) 64.7,3 52.3,3 ccw(c52.3,2.7) 52,2.7 52,1.7 ; 52,97.3 ccw(c52.3,97.3) 52.3,97 64.7,97 ccw(c64.7,97.3) 65,97.3 65,98.3 ccw(c64.7,98.3) 64.7,98.6 52.3,98.6 ccw(c52.3,98.3) 52,98.3 52,97.3 ; 69,1.7 ccw(c69.3,1.7) 69.3,1.4 81.7,1.4 ccw(c81.7,1.7) 82,1.7 82,2.7 ccw(c81.7,2.7) 81.7,3 69.3,3 ccw(c69.3,2.7) 69,2.7 69,1.7 ; 69,97.3 ccw(c69.3,97.3) 69.3,97 81.7,97 ccw(c81.7,97.3) 82,97.3 82,98.3 ccw(c81.7,98.3) 81.7,98.6 69.3,98.6 ccw(c69.3,98.3) 69,98.3 69,97.3 ; 97,18.3 ccw(c97.3,18.3) 97.3,18 98.3,18 ccw(c98.3,18.3) 98.6,18.3 98.6,30.7 ccw(c98.3,30.7) 98.3,31 97.3,31 ccw(c97.3,30.7) 97,30.7 97,18.3 ; 97,35.3 ccw(c97.3,35.3) 97.3,35 98.3,35 ccw(c98.3,35.3) 98.6,35.3 98.6,47.7 ccw(c98.3,47.7) 98.3,48 97.3,48 ccw(c97.3,47.7) 97,47.7 97,35.3 ; 97,52.3 ccw(c97.3,52.3) 97.3,52 98.3,52 ccw(c98.3,52.3) 98.6,52.3 98.6,64.7 ccw(c98.3,64.7) 98.3,65 97.3,65 ccw(c97.3,64.7) 97,64.7 97,52.3 ; 97,69.3 ccw(c97.3,69.3) 97.3,69 98.3,69 ccw(c98.3,69.3) 98.6,69.3 98.6,81.7 ccw(c98.3,81.7) 98.3,82 97.3,82 ccw(c97.3,81.7) 97,81.7 97,69.3
  lines w1: 95,0 ccw(c95,5) 100,5 100,95 ccw(c95,95) 95,100 5,100 ccw(c5,95) 0,95 0,5 ccw(c5,5) 5,0 95,0 ; 95,0 95,0

## Text inside footprints (layer, text, board x,y; h text height)
JP2: Top Overlay "39" at 26.167,7.355 h0.76 r270; Top Overlay "40" at 28.707,7.355 h0.76 r270; Top Overlay "2" at 28.707,59.933 h0.76 r270; Top Overlay "1" at 26.167,59.679 h0.76 r270
JP3: Top Overlay "39" at 62.743,7.355 h0.76 r270; Top Overlay "40" at 65.283,7.355 h0.76 r270; Top Overlay "2" at 65.283,59.933 h0.76 r270; Top Overlay "1" at 62.743,59.679 h0.76 r270
OLED1: Top Overlay "GND" at 37.496,90.912 h0.76; Top Overlay "VCC" at 40.312,90.833 h0.76; Top Overlay "SCL" at 43.134,90.853 h0.76; Top Overlay "SDA" at 45.527,90.868 h0.76; Top Overlay "CS" at 53.378,90.863 h0.76; Top Overlay "DC" at 50.871,90.846 h0.76; Top Overlay "RES" at 48.019,90.866 h0.76; Top Overlay "OLED 1.3-128*64" at 36.576,77.851 h0.76
OLED2: Top Overlay "GND" at 78.032,81.701 h0.76 r90; Top Overlay "VCC" at 80.572,81.701 h0.76 r90; Top Overlay "SCL" at 83.112,81.701 h0.76 r90; Top Overlay "SDA" at 85.652,81.574 h0.76 r90
U1: Top Overlay "5V" at 56.647,51.551 h0.76 r90; Top Overlay "G" at 56.647,54.599 h0.76 r90; Top Overlay "3.3" at 56.647,56.123 h0.76 r90; Top Overlay "G" at 36.835,8.625 h0.76 r90; Top Overlay "G" at 36.835,11.165 h0.76 r90; Top Overlay "3.3" at 36.835,13.197 h0.76 r90; Top Overlay "VB" at 36.581,56.885 h0.76 r90; Top Overlay "BADBOYHUAN" at 57.409,25.262 h0.76 r90